# Altium PCB TwoPinSherlockDistribution.PcbDoc
Units mil, origin at the board's own origin, x right, y up, seen from the top; angles counter-clockwise.
Board outline 1050 x 1300 mil, 2 copper layers (Top Layer, Bottom Layer); 4 components, 2 nets, 8 pads, 4 vias.
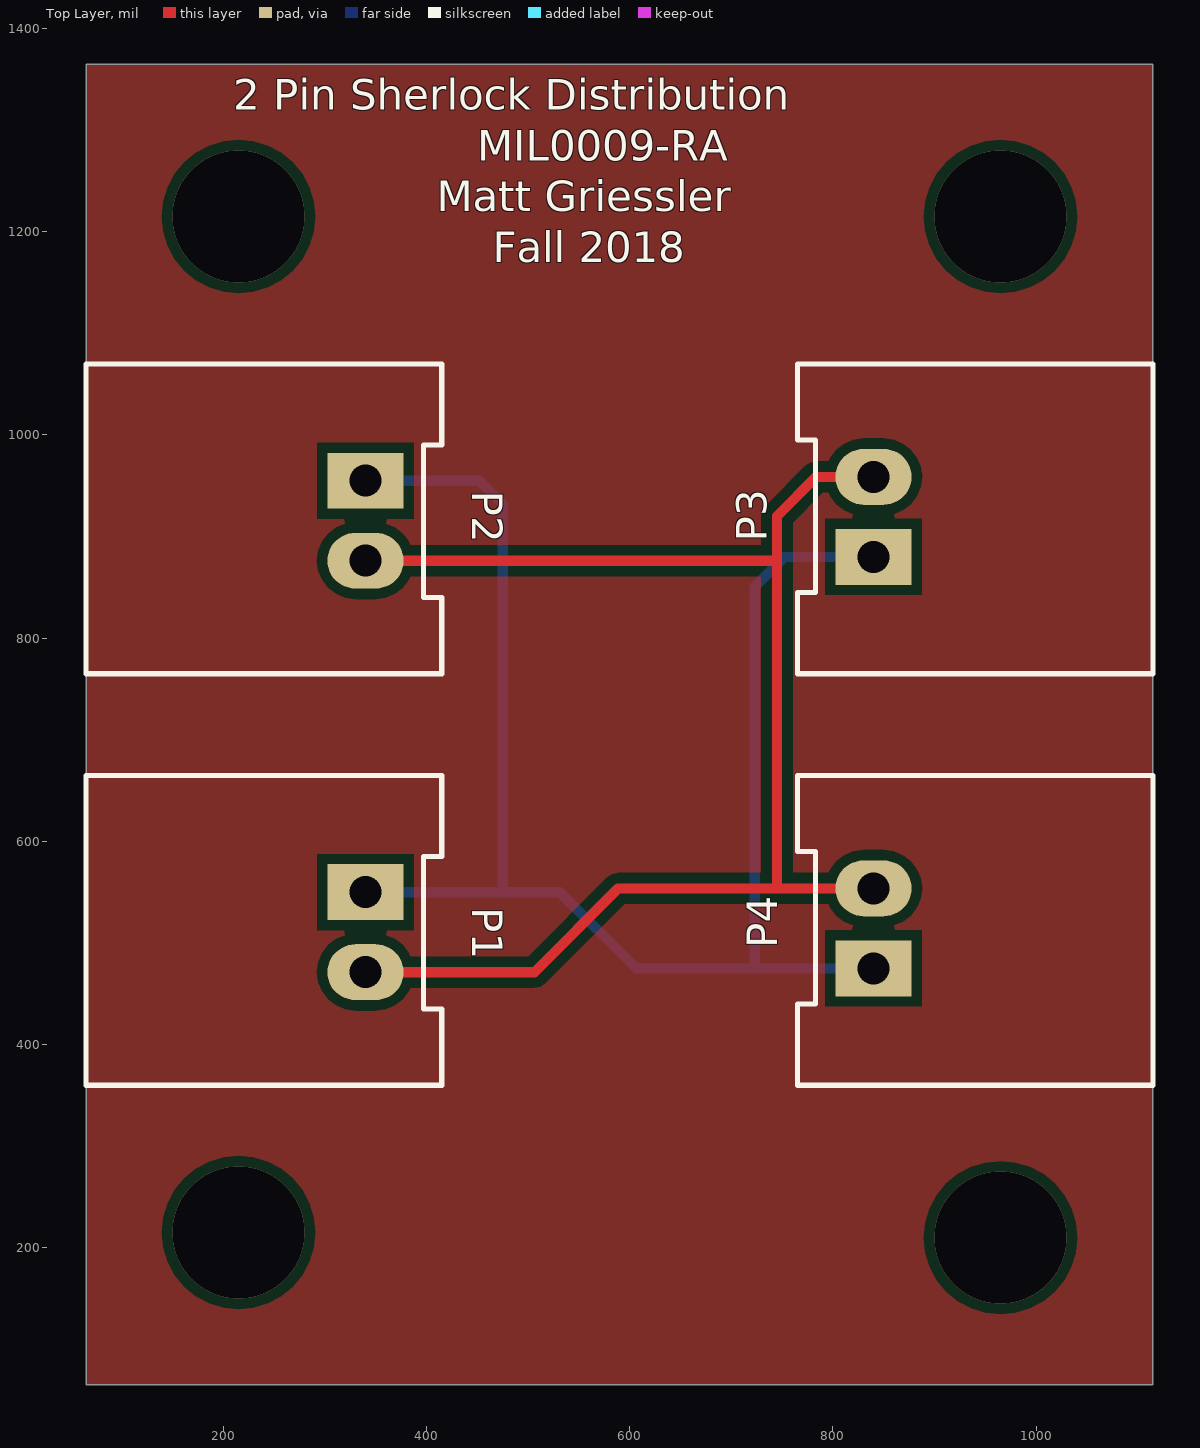
[diagram p0: Top Layer view]
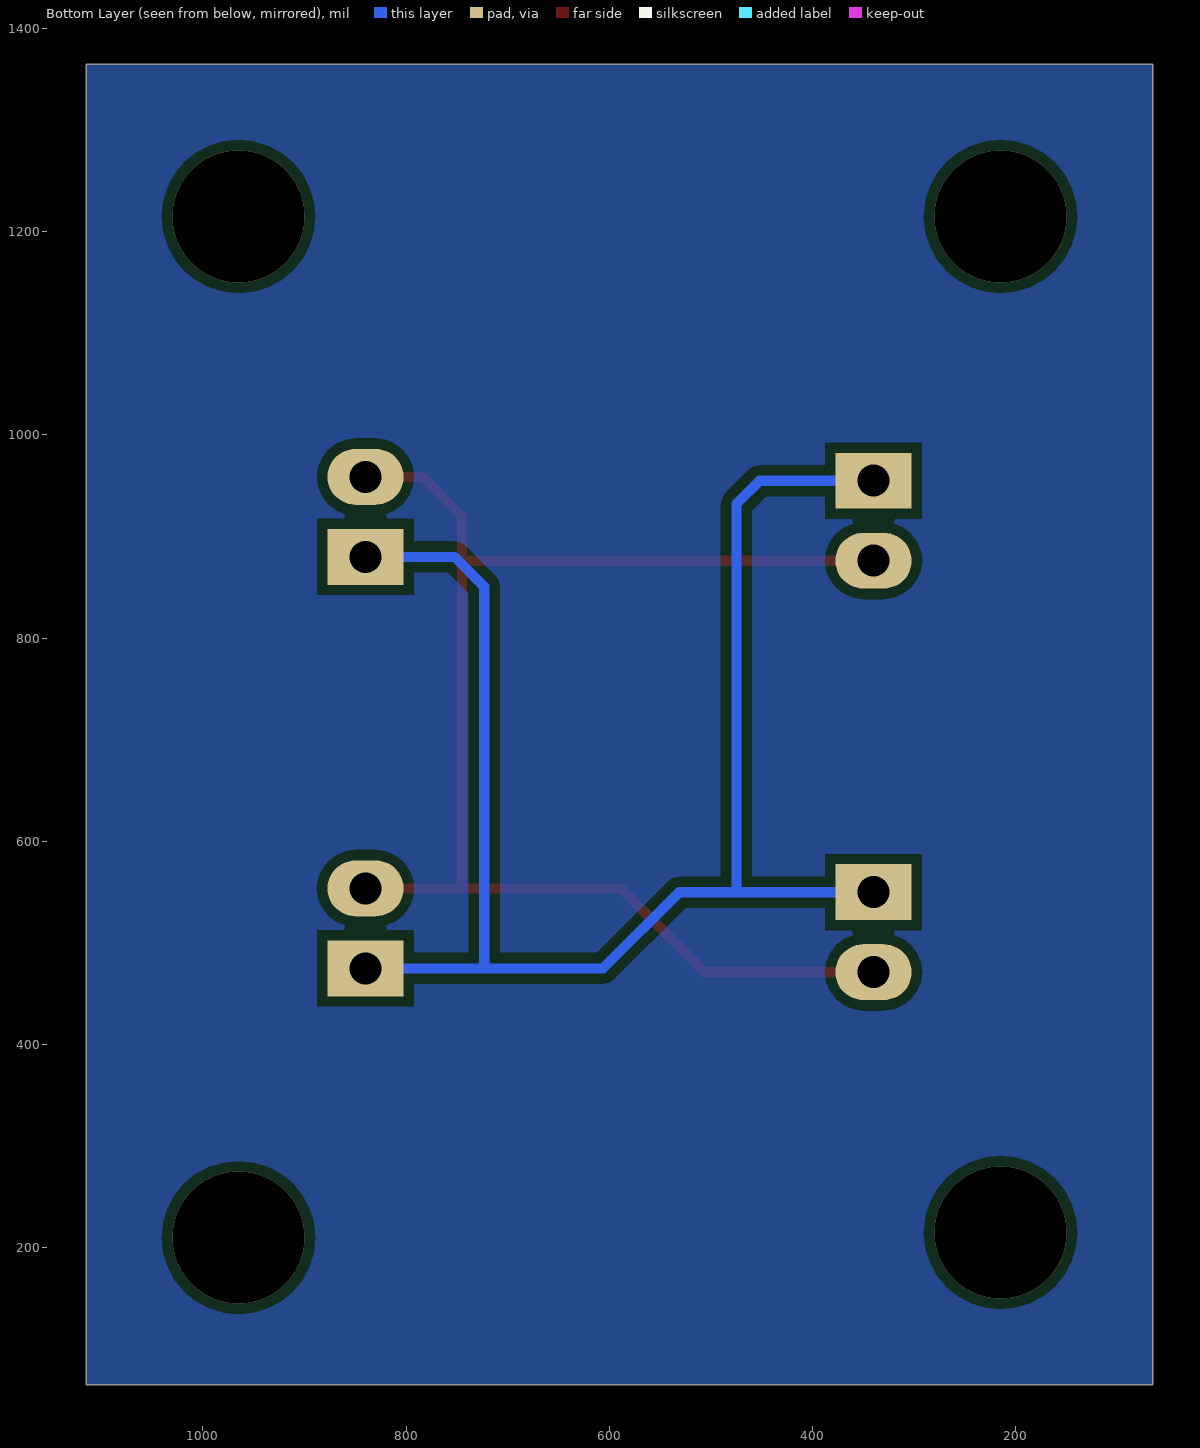
[diagram p1: Bottom Layer view, seen from below]
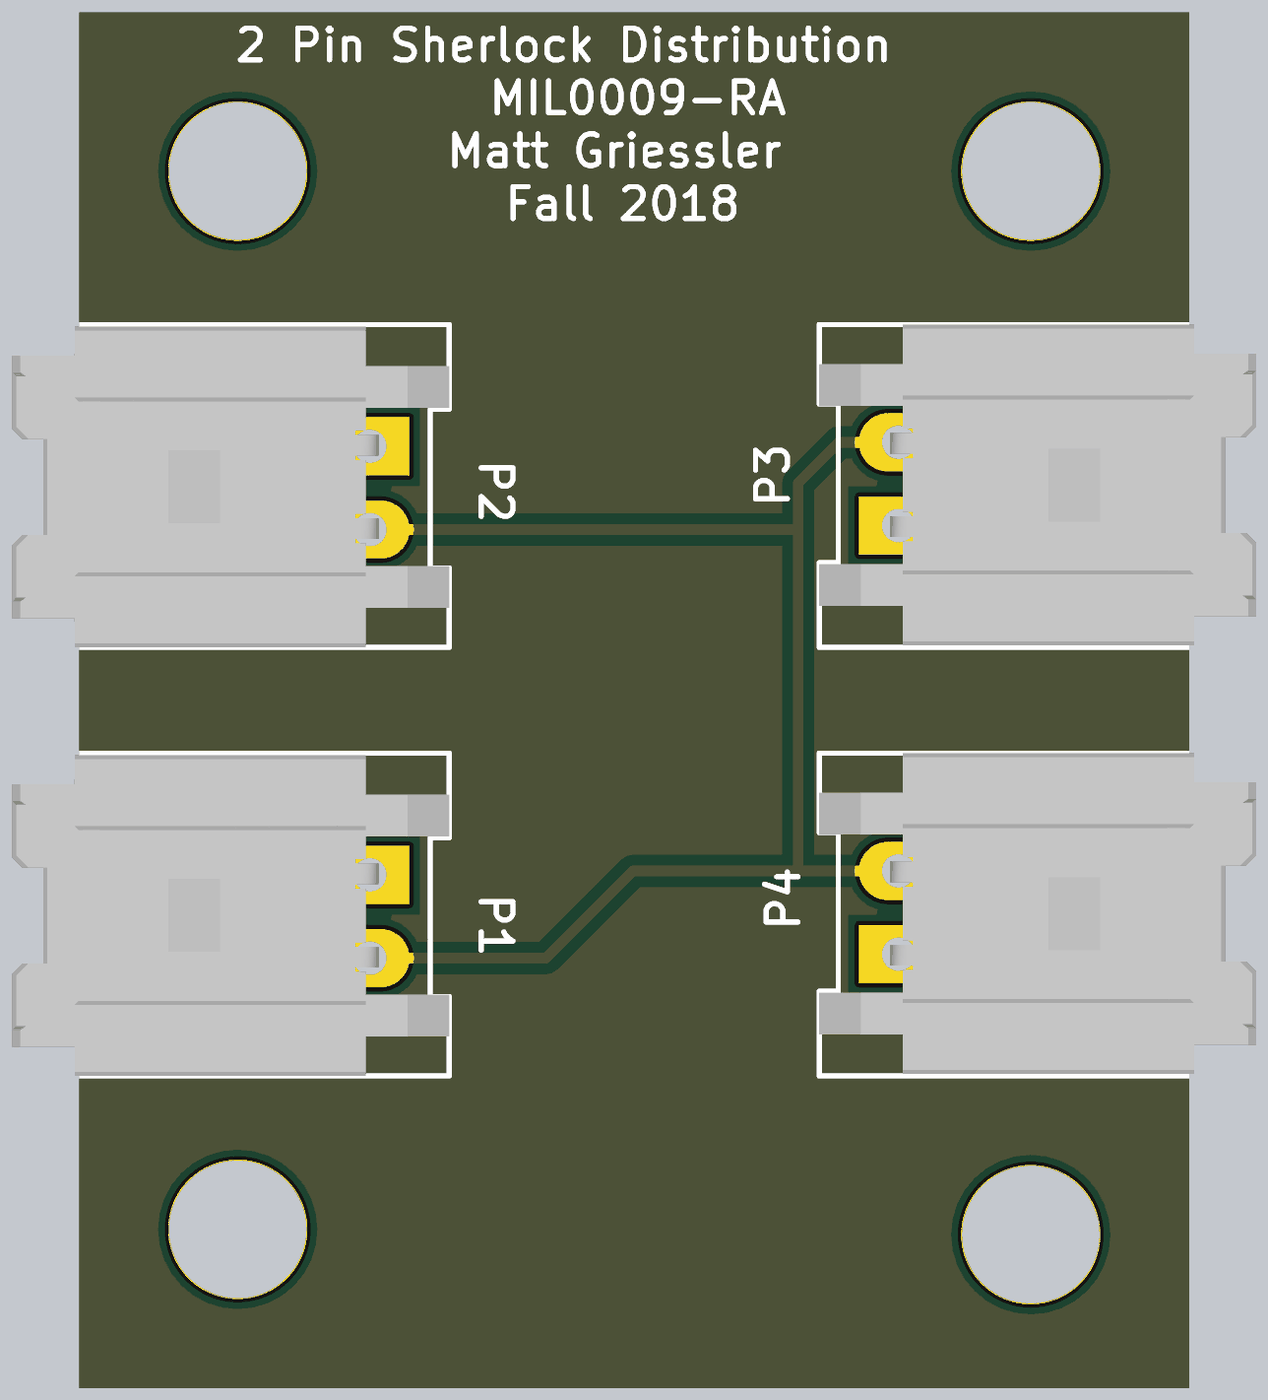
[diagram p2: 3D render of the assembled board from above, using the file's embedded part models]

## Layer stack, top to bottom
Top Solder: solder mask 0.4, Solder Resist, Dk 3.5
Top Layer: signal copper 1.4
Dielectric 1: dielectric 12.6, FR-4, Dk 4.8
Bottom Layer: signal copper 1.4
Bottom Solder: solder mask 0.4, Solder Resist, Dk 3.5

## Board outline
65,65 1115,65 1115,1365 65,1365

## Design rules (kind name [scope] priority, off if disabled: settings)
Clearance [All] p1: gap=10 ignorepadtopadclearanceinfootprint=FALSE except(0: Arc-Hole Track-Hole SMDPad-Hole THPad-Hole Via-Hole Fill-Hole Poly-Hole Region-Hole Text-Hole; 5: Track-Track Track-SMDPad SMDPad-SMDPad; 7: Track-Via)
HoleSize [All] p1: absolutevalues=TRUE maxlimit=150 minlimit=10 maxpercent=80.000 minpercent=20.000
MinimumAnnularRing [All] p1: minimumring=7
MinimumSolderMaskSliver [All] p1: minsoldermaskwidth=1
PolygonConnect [All] p1: connectstyle=Relief reliefconductorwidth=10 reliefentries=4 polygonreliefangle="90 Angle" airgapwidth=10
RoutingVias [All] p1: holewidth=10 width=22 viastyle="Through Hole" minholewidth=10 minwidth=22 maxholewidth=100 maxwidth=150
SilkToSolderMaskClearance [IsPad] p1: minsilkscreentomaskgap=5 clearancetoexposedcopper=TRUE
SolderMaskExpansion [All] p1: expansion=4
Width [All] p1: maxlimit=150 minlimit=8 preferedwidth=10
27 further rules are at their usual default settings.

## Components (designator, comment, footprint, x,y, rotation, side; value= is the part's Value field where it differs from the comment)
P1 "2-pin Horz Sherlock" MOLEX-HDR-1X2-SHERLOCK-HORZ 340,550 r90 top
P2 "2-pin Horz Sherlock" MOLEX-HDR-1X2-SHERLOCK-HORZ 340,955 r90 top
P3 "2-pin Horz Sherlock" MOLEX-HDR-1X2-SHERLOCK-HORZ 840,880 r270 top
P4 "2-pin Horz Sherlock" MOLEX-HDR-1X2-SHERLOCK-HORZ 840,475 r270 top

## Footprints (in the part's own frame and the unit in brackets; to place one, negate y for a bottom-side part, rotate by r counter-clockwise, add the part's x,y. Pads: shape width x height; smd on the part's side, far side on the other; paste and mask are expansions set on the pad)
MOLEX-HDR-1X2-SHERLOCK-HORZ [mm]
  rect 1.397x1.905 hole 0.8: 1(0,0)
  oval 1.397x1.905 hole 0.8: 2(-2,0)
  silkscreen extent -4.83,-1.91 2.92,6.98, body extent -4.83,-1.91 2.87,8.59, height 5.54

## Part data
P1 P2 P3 P4: library part MOLEX-HDR-1x2-SHERLOCK_RA, "Header, Molex, 2mm Pitch Sherlock Header, Single Row, Horizontal, 2 Circuits, Length 3.3mm,  0353630260", Manufacturer="Molex Inc", Manufacturer Part Number=0353630260, Supplier Part Number 1=WM18931-ND, Supplier 1=Digi-Key

## Via types
v1: diameter 130, hole 130, Top Layer to Bottom Layer, 4 vias

## Nets (pads, with @x,y where several pads share a name; then routed paths per layer and width w, separated by ;. In a path a pad name is that pad's centre, name@x,y a point inside that pad or via, vN(x,y) a via of type N, cw(c..) or ccw(c..) an arc to the next point about the centre after c; other vN are vias at no path point)
Pin1: P1.1 P2.1 P3.1 P4.1 | length 1569.3
  Top Layer w10: P1.1@335,545 P1.1
  Bottom Layer w10: P1.1 475,550 ; P2.1 451.99,955 475,931.99 475,550 ; P4.1 723.13,475 ; P3.1 752.5,880 723.13,850.63 723.13,475 ; 475,550 531.26,550 606.26,475 723.13,475
Pin2: P1.2 P2.2 P3.2 P4.2 | length 1417
  Top Layer w10: P1.2 506.26,471.26 588.74,553.74 745,553.74 ; P2.2 743.74,876.26 745,875 ; P4.2 745,553.74 ; P3.2 783.74,958.74 745,920 745,875 ; 745,553.74 745,875
copper on no net:
  other v1: 965,210 215,215 215,1215 965,1215

## Polygon pours and split planes (outlines as drawn)
no net on Top Layer (solid, pour order 0): 65,1365 1115,1365 1115,65 65,65
no net on Bottom Layer (solid, pour order 2): 65,1365 1115,1365 1115,65 65,65

## Silkscreen, mask and mechanical layers (free items; w line width, h text height)
Top Overlay:
  text "2 Pin Sherlock Distribution" at 210,1320 h30
  text "MIL0009-RA" at 450,1270 h30
  text "Matt Griessler" at 410,1220 h30
  text "Fall 2018" at 465,1170 h30
BO:
  the board outline again, w10